# Altium PCB demo_board_shortened_DDR.PcbDoc (part 2 of 2)
Units mil, origin at the board's own origin, x right, y up, seen from the top; angles counter-clockwise.
Board outline 6000 x 4000 mil, 4 copper layers (L1, L2, L3, L4), stack 64.6 mil thick; 47 components, 45 nets, 406 pads, 119 vias.
Unrouted connection lines stored in the file: 95.
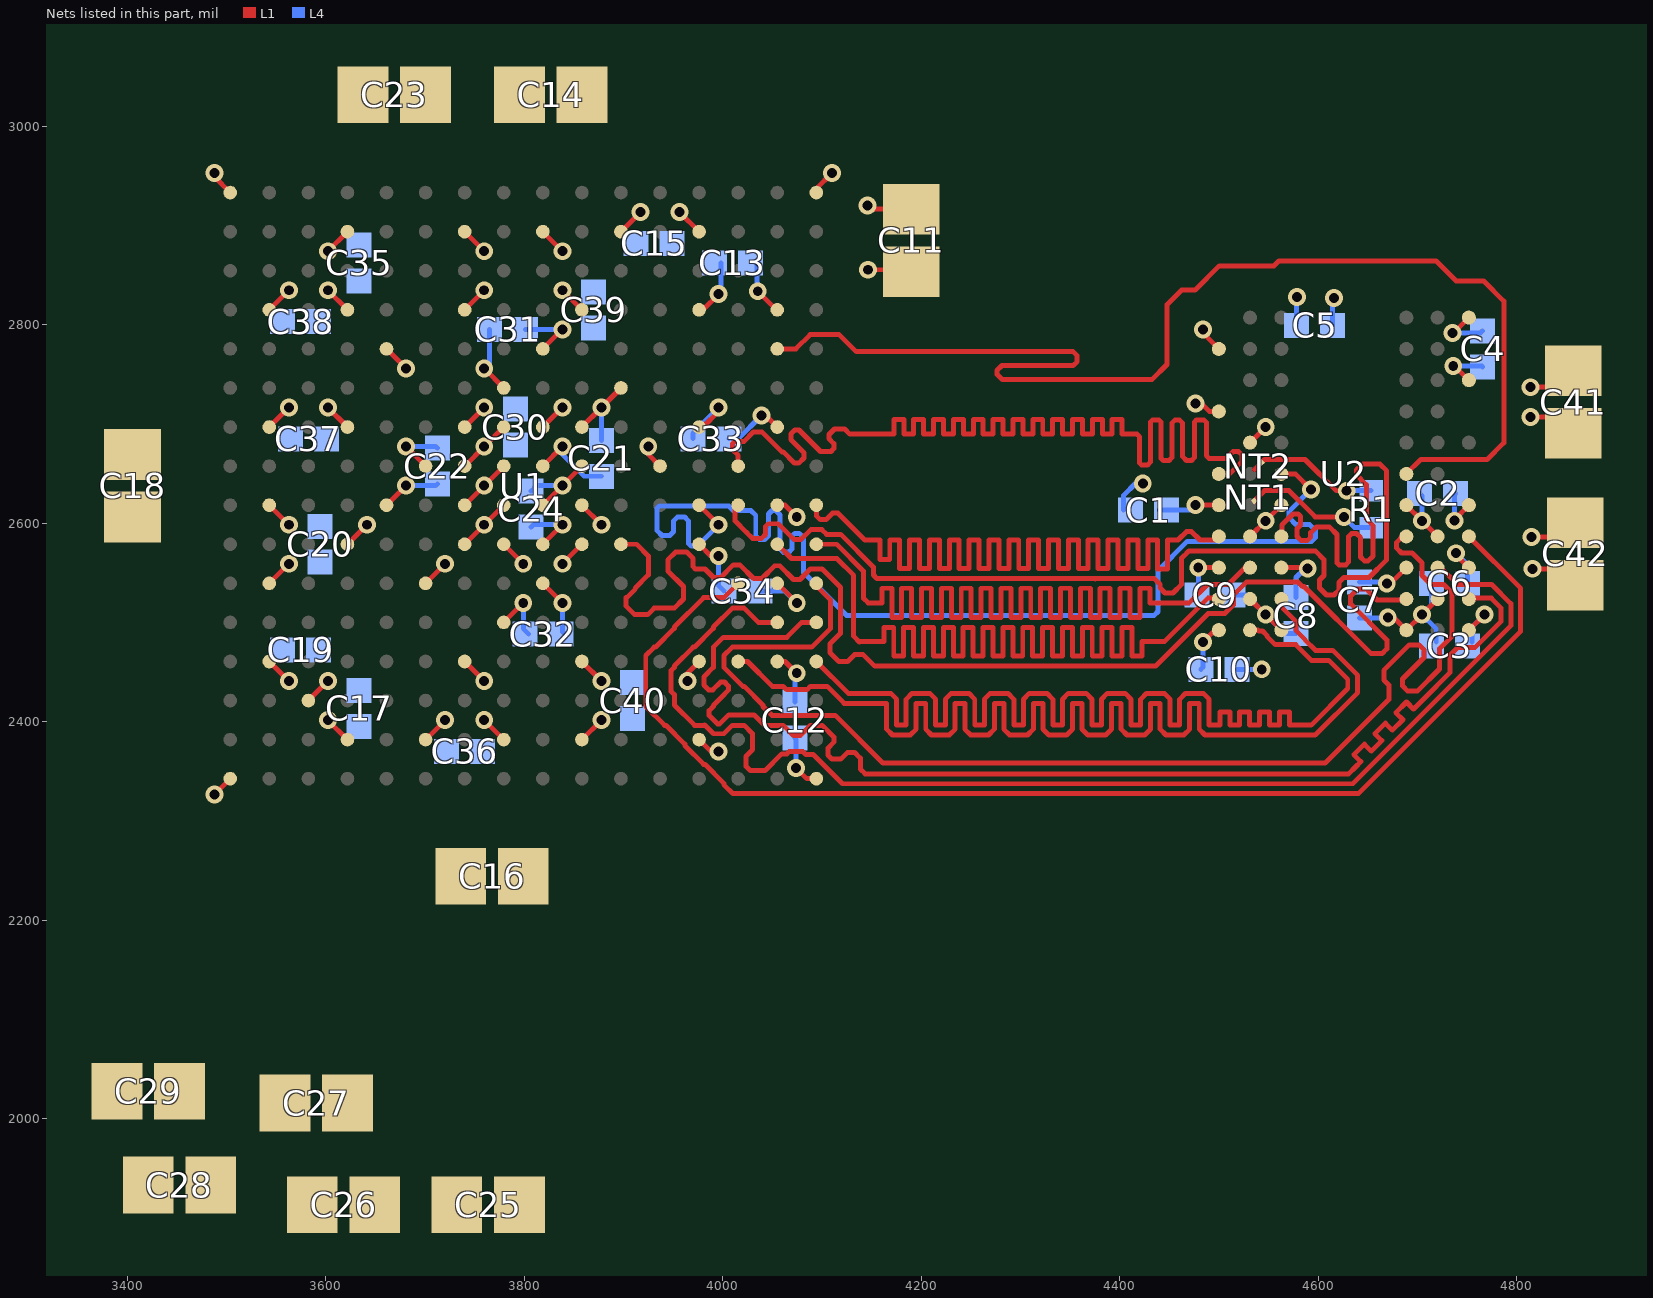
[diagram p3: the nets of this part, all layers, seen from the top]

## Via types
v1: diameter 18, hole 10, L1 to L4, 119 vias

## Nets (pads, with @x,y where several pads share a name; then routed paths per layer and width w, separated by ;. In a path a pad name is that pad's centre, name@x,y a point inside that pad or via, vN(x,y) a via of type N, cw(c..) or ccw(c..) an arc to the next point about the centre after c; other vN are vias at no path point) (continued)
DM/RDQS: U1.K11 U2.B3 | length 1280.2
  L1 w5: U1.K11@3897.64,2578.74 3913.39,2578.74 3925.2,2566.93 3925.2,2547.91 3912.03,2534.74 3912.03,2533.41 3903.6,2524.98 3902.93,2524.98 3902.93,2516.36 3911.42,2507.87 3924.53,2507.87 3931.05,2514.39 3951.4,2514.39 3960.63,2523.62 3960.63,2536.1 3944.88,2551.85 3944.88,2562.99 3952.76,2570.87 3963.9,2570.87 3970.42,2564.35 3970.42,2556.16 3972.82,2553.76 3982.34,2553.76 3990.82,2545.28 3998.03,2545.28 4010.83,2558.07 4017.4,2558.07 4031.18,2544.29 4039.69,2544.29 4052.48,2557.09 4057.75,2557.09 4071.53,2543.31 4078.07,2543.31 4088.53,2553.76 4100.45,2553.76 4118.88,2535.33 4118.88,2488.96 4108.27,2478.35 4108.27,2469.49 4117.13,2460.63 4125.98,2460.63 4132.87,2467.52 4141.73,2467.52 4153.35,2455.9 4436.22,2455.9 4489.35,2509.04 4506.04,2509.04 4514.59,2517.58 4514.59,2527.34 4527.78,2540.53 4579.83,2540.53 4584.24,2536.12 4585.89,2536.12 4653.5,2468.5 4664.37,2468.5 4669.29,2473.43 4669.29,2482.28 4632.87,2518.7 4632.87,2526.57 4639.76,2533.46 4648.62,2533.46 4659.45,2522.64 4687.99,2522.64 U2.B3@4688.98,2523.62
DQ0: U1.L14 U2.D1 | length 1279.9
  L1 w5: U1.L14@4015.75,2539.37 4001.36,2524.98 3981.01,2524.98 3951.4,2495.37 3951.4,2494.04 3932.38,2475.02 3931.05,2475.02 3922.62,2466.59 3922.62,2415.3 3941.64,2396.28 3942.97,2396.28 3961.99,2377.26 3961.99,2375.93 3981.01,2356.91 3982.34,2356.91 4001.36,2337.89 4001.36,2336.56 4010.48,2327.44 4640.59,2327.44 4804.22,2491.07 4804.22,2534.37 U2.D1@4751.97,2586.61
DQ1: U1.L16 U2.D3 | length 1281.1
  L1 w5: U1.L16@4094.49,2539.37 4097.59,2536.27 4096.3,2534.97 4108.88,2522.39 4108.88,2494.04 4089.86,2475.02 4009.79,2475.02 4001.36,2466.59 4001.36,2454.67 4020.38,2435.65 4021.71,2435.65 4040.73,2416.63 4040.73,2415.3 4049.75,2406.28 4113.41,2406.28 4161.42,2358.27 4607.24,2358.27 4671.26,2422.29 4671.26,2437.01 4666.34,2441.93 4666.34,2451.77 4691.93,2477.36 4701.77,2477.36 4706.69,2472.44 4706.69,2464.57 4685.04,2442.91 4685.04,2436.07 4690.31,2430.79 4700.11,2430.79 4722.44,2453.12 4722.44,2473.47 4735.06,2486.08 4735.06,2529.66 4726.51,2538.21 4713.76,2538.21 4704.72,2547.24 4704.72,2560 4694.84,2569.88 4684.06,2569.88 4679.13,2574.8 4679.13,2580.71 4685.04,2586.61 U2.D3@4688.98,2586.61
DQ2: U1.M15 U2.C2 | length 1281
  L1 w5: U1.M15@4055.12,2500 4036.1,2500 4021.71,2514.39 4009.79,2514.39 3990.77,2495.37 3990.77,2494.04 3971.75,2475.02 3970.42,2475.02 3951.4,2456 3951.4,2454.67 3948.06,2451.33 3948.06,2430.56 3951.4,2427.22 3951.4,2416.71 3971.83,2396.28 3981.59,2396.28 3981.96,2396.65 3990.82,2387.8 4001.3,2387.8 4009.79,2396.28 4021.71,2396.28 4030.14,2387.85 4030.14,2371.67 4023.62,2365.16 4023.62,2355 4027.89,2350.73 4042.97,2350.73 4059.75,2367.5 4064.72,2367.5 4067.18,2369.96 4080.85,2369.96 4083.9,2366.91 4091.39,2366.91 4120.86,2337.44 4635.05,2337.44 4794.22,2496.61 4794.22,2518.85 4774.86,2538.21 4740.66,2538.21 4723.75,2555.12 U2.C2@4720.47,2555.12
DQ3: U1.M16 U2.B1 | length 1279.1
  L1 w5: U1.M16@4094.49,2500 4079.72,2500 4064.74,2485.02 4000.77,2485.02 3990.77,2475.02 3990.77,2454.67 3981.3,2445.2 3981.3,2436.69 3985.9,2432.09 3990.16,2432.09 3998.03,2439.96 4001.93,2439.96 4005.91,2435.98 4005.91,2431.77 4001.36,2427.22 4001.36,2426.93 3990.77,2416.34 3990.77,2415.3 3986.55,2411.08 3986.55,2406.21 3994.97,2397.8 3997.16,2397.8 4006.24,2406.87 4031.74,2406.87 4042.33,2396.28 4061.08,2396.28 4071.53,2385.83 4078.07,2385.83 4088.53,2396.28 4100.45,2396.28 4112.2,2384.52 4112.2,2379.26 4106.3,2373.35 4106.3,2366.14 4110.24,2362.2 4119.09,2362.2 4125.98,2369.09 4132.95,2369.09 4138.78,2363.26 4138.78,2352.36 4143.7,2347.44 4630.91,2347.44 4637.8,2354.33 4643.1,2359.63 4636.03,2366.71 4646.63,2377.31 4653.71,2370.24 4664.31,2380.85 4657.24,2387.92 4667.85,2398.52 4674.92,2391.45 4685.52,2402.06 4678.45,2409.13 4689.06,2419.74 4696.13,2412.67 4706.69,2423.23 4732.78,2449.31 4732.78,2466.66 4741.01,2474.9 4758.37,2474.9 4784.22,2500.75 4784.22,2514.71 4774.55,2524.37 4752.72,2524.37 U2.B1@4751.97,2523.62
DQ4: U1.J14 U2.D7 | length 1279.8
  L1 w5: U1.J14@4015.75,2618.11 4012.56,2614.93 4012.56,2602.36 4024.45,2590.48 4024.45,2590.39 4030.19,2584.65 4039.37,2584.65 4043.31,2588.58 4043.31,2596.54 4046.18,2599.41 4056.1,2599.41 4071.85,2583.66 4079.06,2583.66 4088.9,2593.5 4100.07,2593.5 4104.84,2588.74 4119.04,2588.74 4152.05,2555.73 4152.05,2547.76 4155.51,2544.29 4155.64,2544.42 4374.65,2544.42 4375.51,2543.56 4376.37,2544.42 4434.65,2544.42 4440.94,2538.13 4440.94,2534.61 4445.87,2529.68 4453.9,2529.68 4462.6,2538.39 4462.6,2564.67 4464.61,2566.68 4469.95,2572.03 4597.26,2572.03 4606.07,2563.22 4606.07,2547.3 4601.54,2542.77 4601.54,2534.61 4608.59,2527.56 4616.14,2527.56 4621.06,2532.48 4621.06,2540.35 4625.98,2545.28 4651.42,2545.28 4669.13,2562.99 4669.13,2652.72 4662.4,2659.45 4644.69,2659.45 4638.78,2653.54 4638.78,2648.62 4648.62,2638.78 4648.62,2604.33 4655.51,2597.44 4655.51,2566.93 4650.59,2562.01 4646.65,2562.01 4642.72,2565.94 4642.72,2585.63 4638.78,2589.57 4633.86,2589.57 4630.91,2586.61 4630.91,2561.02 4627.95,2558.07 4621.06,2558.07 4619.09,2560.04 4619.09,2588.58 4611.38,2596.3 4598.43,2596.3 4592.52,2590.39 4592.52,2585.63 4589.57,2582.68 4582.68,2582.68 4578.74,2586.61 4578.74,2594.49 4582.33,2598.08 4582.33,2606.94 4579.99,2609.27 4574.78,2609.27 4563.74,2598.23 4563.74,2586.61 U2.D7@4562.99,2586.61
DQ5: U1.J16 U2.D9 | length 1280.5
  L1 w5: U1.J16@4094.49,2618.11 4094.49,2607.44 4098.43,2603.5 4104.22,2603.5 4110.95,2610.24 4116.18,2610.24 4143.44,2582.97 4148.44,2582.97 4158.44,2582.97 4158.44,2563.48 4168.44,2563.48 4168.44,2582.97 4178.44,2582.97 4178.44,2554.42 4188.44,2554.42 4188.44,2582.97 4198.44,2582.97 4198.44,2554.42 4208.44,2554.42 4208.44,2582.97 4218.44,2582.97 4218.44,2554.42 4228.44,2554.42 4228.44,2582.97 4238.44,2582.97 4238.44,2554.42 4248.44,2554.42 4248.44,2582.97 4258.44,2582.97 4258.44,2554.42 4268.44,2554.42 4268.44,2582.97 4278.44,2582.97 4278.44,2554.42 4288.44,2554.42 4288.44,2582.97 4298.44,2582.97 4298.44,2554.42 4308.44,2554.42 4308.44,2582.97 4318.44,2582.97 4318.44,2554.42 4328.44,2554.42 4328.44,2582.97 4338.44,2582.97 4338.44,2554.42 4348.44,2554.42 4348.44,2582.97 4358.44,2582.97 4358.44,2554.42 4368.44,2554.42 4368.44,2582.97 4378.44,2582.97 4378.44,2554.42 4388.44,2554.42 4388.44,2582.97 4398.44,2582.97 4398.44,2554.42 4408.44,2554.42 4408.44,2582.97 4418.44,2582.97 4418.44,2554.42 4428.44,2554.42 4428.44,2582.97 4438.44,2582.97 4438.44,2553.67 4448.44,2553.67 4448.44,2582.97 4454.72,2582.97 4458.92,2582.97 4467.56,2591.61 4472.37,2591.61 4481,2582.97 4496.36,2582.97 U2.D9@4500,2586.61
DQ6: U1.K15 U2.B9 | length 1283.5
  L1 w5: U1.K15@4055.12,2578.74 4069.51,2564.35 4115.15,2564.35 4132.05,2547.45 4132.05,2486.06 4137.8,2480.32 4138.01,2480.53 4157.48,2480.53 4162.48,2480.53 4162.48,2494.85 4172.48,2494.85 4172.48,2480.53 4172.48,2466.26 4182.48,2466.26 4182.48,2480.53 4182.48,2494.85 4192.48,2494.85 4192.48,2480.53 4192.48,2466.26 4202.48,2466.26 4202.48,2480.53 4202.48,2494.85 4212.48,2494.85 4212.48,2480.53 4212.48,2466.26 4222.48,2466.26 4222.48,2480.53 4222.48,2494.85 4232.48,2494.85 4232.48,2480.53 4232.48,2466.26 4242.48,2466.26 4242.48,2480.53 4242.48,2494.85 4252.48,2494.85 4252.48,2480.53 4252.48,2466.26 4262.48,2466.26 4262.48,2480.53 4262.48,2494.85 4272.48,2494.85 4272.48,2480.53 4272.48,2466.26 4282.48,2466.26 4282.48,2480.53 4282.48,2494.85 4292.48,2494.85 4292.48,2480.53 4292.48,2466.26 4302.48,2466.26 4302.48,2480.53 4302.48,2494.85 4312.48,2494.85 4312.48,2480.53 4312.48,2466.26 4322.48,2466.26 4322.48,2480.53 4322.48,2494.85 4332.48,2494.85 4332.48,2480.53 4332.48,2466.26 4342.48,2466.26 4342.48,2480.53 4342.48,2494.85 4352.48,2494.85 4352.48,2480.53 4352.48,2466.26 4362.48,2466.26 4362.48,2480.53 4362.48,2494.85 4372.48,2494.85 4372.48,2480.53 4372.48,2466.26 4382.48,2466.26 4382.48,2480.53 4382.48,2494.85 4392.48,2494.85 4392.48,2480.53 4392.48,2466.26 4402.48,2466.26 4402.48,2480.53 4402.48,2494.85 4412.48,2494.85 4412.48,2480.53 4412.48,2466.26 4422.48,2466.26 4422.48,2480.53 4425.2,2480.53 4445.09,2480.53 4488.94,2524.37 4499.25,2524.37 U2.B9@4500,2523.62
DQ7: U1.K16 U2.C8 | length 1283.5
  L1 w5: U1.K16@4094.49,2578.74 4114.9,2578.74 4142.05,2551.59 4142.05,2524.29 4146.65,2519.68 4155.51,2519.68 4160.51,2519.68 4160.51,2534.42 4170.51,2534.42 4170.51,2519.68 4170.51,2505.12 4180.51,2505.12 4180.51,2519.68 4180.51,2534.42 4190.51,2534.42 4190.51,2519.68 4190.51,2505.12 4200.51,2505.12 4200.51,2519.68 4200.51,2534.42 4210.51,2534.42 4210.51,2519.68 4210.51,2505.12 4220.51,2505.12 4220.51,2519.68 4220.51,2534.42 4230.51,2534.42 4230.51,2519.68 4230.51,2505.12 4240.51,2505.12 4240.51,2519.68 4240.51,2534.42 4250.51,2534.42 4250.51,2519.68 4250.51,2505.12 4260.51,2505.12 4260.51,2519.68 4260.51,2534.42 4270.51,2534.42 4270.51,2519.68 4270.51,2505.12 4280.51,2505.12 4280.51,2519.68 4280.51,2534.42 4290.51,2534.42 4290.51,2519.68 4290.51,2505.12 4300.51,2505.12 4300.51,2519.68 4300.51,2534.42 4310.51,2534.42 4310.51,2519.68 4310.51,2505.12 4320.51,2505.12 4320.51,2519.68 4320.51,2534.42 4330.51,2534.42 4330.51,2519.68 4330.51,2505.12 4340.51,2505.12 4340.51,2519.68 4340.51,2534.42 4350.51,2534.42 4350.51,2519.68 4350.51,2505.12 4360.51,2505.12 4360.51,2519.68 4360.51,2534.42 4370.51,2534.42 4370.51,2519.68 4370.51,2505.12 4380.51,2505.12 4380.51,2519.68 4380.51,2534.42 4390.51,2534.42 4390.51,2519.68 4390.51,2505.12 4400.51,2505.12 4400.51,2519.68 4400.51,2534.42 4410.51,2534.42 4410.51,2519.68 4410.51,2505.12 4420.51,2505.12 4420.51,2519.68 4420.51,2534.42 4430.51,2534.42 4430.51,2519.68 4433.07,2519.68 4470.11,2519.68 4488.63,2538.21 4509.48,2538.21 4526.39,2555.12 U2.C8@4531.5,2555.12
DQS_N: U1.N16 U2.A8 | length 1283.5
  L1 w5: U1.N16@4094.49,2460.63 4126.67,2428.44 4169.5,2428.44 4175.35,2422.59 4175.35,2396.52 4185.04,2396.52 4185.04,2422.59 4190.9,2428.44 4208.87,2428.44 4214.72,2422.59 4214.72,2396.52 4224.41,2396.52 4224.41,2422.59 4230.27,2428.44 4248.24,2428.44 4254.09,2422.59 4254.09,2396.52 4263.78,2396.52 4263.78,2422.59 4269.64,2428.44 4287.61,2428.44 4293.46,2422.59 4293.46,2396.52 4303.15,2396.52 4303.15,2422.59 4309.01,2428.44 4326.98,2428.44 4332.83,2422.59 4332.83,2396.52 4342.52,2396.52 4342.52,2422.59 4348.38,2428.44 4366.35,2428.44 4372.2,2422.59 4372.2,2396.52 4381.89,2396.52 4381.89,2422.59 4387.75,2428.44 4405.72,2428.44 4411.57,2422.59 4411.57,2396.52 4421.26,2396.52 4421.26,2422.59 4427.12,2428.44 4445.09,2428.44 4450.94,2422.59 4450.94,2396.52 4460.63,2396.52 4460.63,2422.59 4466.49,2428.44 4484.46,2428.44 4490.31,2422.59 4490.31,2396.52 4496.06,2396.52 4501.06,2396.52 4501.06,2409.81 4511.06,2409.81 4511.06,2396.52 4521.06,2396.52 4521.06,2409.81 4531.06,2409.81 4531.06,2396.52 4541.06,2396.52 4541.06,2409.81 4551.06,2409.81 4551.06,2396.52 4561.06,2396.52 4561.06,2409.81 4571.06,2409.81 4571.06,2396.52 4578.74,2396.52 4593.04,2396.52 4629.92,2433.39 4629.92,2442.55 4610.65,2461.82 4593.3,2461.82 4577.58,2477.54 4556.95,2477.54 4548.41,2486.08 4548.41,2487.03 4544.06,2491.37 4540.41,2491.37 4539.66,2492.13 U2.A8@4531.5,2492.13
DQS_P: U1.N14 U2.B7 | length 1283
  L1 w5: U1.N14@4015.75,2460.63 4025.14,2460.63 4050.12,2435.65 4061.08,2435.65 4064.41,2432.31 4085.19,2432.31 4088.53,2435.65 4105.33,2435.65 4122.53,2418.44 4165.35,2418.44 4165.35,2392.37 4171.21,2386.52 4189.18,2386.52 4195.04,2392.37 4195.04,2418.44 4204.72,2418.44 4204.72,2392.37 4210.58,2386.52 4228.55,2386.52 4234.41,2392.37 4234.41,2418.44 4244.09,2418.44 4244.09,2392.37 4249.95,2386.52 4267.92,2386.52 4273.78,2392.37 4273.78,2418.44 4283.46,2418.44 4283.46,2392.37 4289.32,2386.52 4307.29,2386.52 4313.15,2392.37 4313.15,2418.44 4322.83,2418.44 4322.83,2392.37 4328.69,2386.52 4346.66,2386.52 4352.52,2392.37 4352.52,2418.44 4362.2,2418.44 4362.2,2392.37 4368.06,2386.52 4386.03,2386.52 4391.89,2392.37 4391.89,2418.44 4401.57,2418.44 4401.57,2392.37 4407.43,2386.52 4425.4,2386.52 4431.26,2392.37 4431.26,2418.44 4440.94,2418.44 4440.94,2392.37 4446.8,2386.52 4464.77,2386.52 4470.63,2392.37 4470.63,2418.44 4480.31,2418.44 4480.31,2392.37 4486.17,2386.52 4597.18,2386.52 4639.92,2429.25 4639.92,2446.69 4614.8,2471.82 4597.44,2471.82 4586.61,2482.65 4586.61,2483.09 4577.58,2492.13 4577.58,2501.16 4562.99,2515.75 U2.B7@4562.99,2523.62
GND: C1.1 C2.1 C3.1 C4.1 C5.1 C6.1 C7.1 C8.1 C9.1 C10.1 C11.1 C12.1 C13.1 C14.1 C15.1 C16.1 C17.1 C18.1 C19.1 C20.1 C21.1 C22.1 C23.1 C24.1 C25.1 C26.1 C27.1 C28.1 C29.1 C30.1 C31.1 C32.1 C33.1 C34.1 C35.1 C36.1 C37.1 C38.1 C39.1 C40.1 C41.1 C42.1 U1.A1 U1.A16 U1.B7 U1.B11 U1.D4 U1.D13 U1.E9 U1.G2 U1.G8 U1.G15 U1.H7 U1.H9 U1.H12 U1.J5 U1.J8 U1.K7 U1.K9 U1.L2 U1.L15 U1.M8 U1.N13 U1.P3 U1.R6 U1.R10 U1.T1 U1.T16 U2.A3 U2.A7 U2.B2 U2.B8 U2.D2 U2.D8 U2.E3 U2.E7 U2.G8 U2.J1 U2.K9 | length 1791.6
  L1 w5: v1(3488.19,2326.77) U1.T1@3503.94,2342.52 ; v1(3488.19,2952.76) 3488.19,2948.82 U1.A1@3503.94,2933.07 ; U1.L2@3543.31,2539.37 v1(3562.99,2559.06) ; U1.G2@3543.31,2696.85 v1(3562.99,2716.54) ; U1.P3@3582.68,2421.26 v1(3602.36,2440.94) ; v1(3602.36,2834.65) U1.D4@3622.05,2814.96 ; U1.J5@3661.42,2618.11 v1(3681.1,2637.8) ; U1.R6@3700.79,2381.89 v1(3720.47,2401.57) ; U1.K7@3740.16,2578.74 v1(3759.84,2598.43) ; U1.H7@3740.16,2657.48 v1(3759.84,2677.17) U1.G8@3779.53,2696.85 ; U1.B7@3740.16,2893.7 v1(3759.84,2874.02) ; v1(3759.84,2598.43) U1.J8@3779.53,2618.11 ; U1.M8@3779.53,2500 v1(3799.21,2519.68) ; U1.K9@3818.9,2578.74 v1(3838.58,2598.43) ; U1.H9@3818.9,2657.48 v1(3838.58,2677.17) ; U1.E9@3818.9,2775.59 v1(3838.58,2795.28) ; U1.R10@3858.27,2381.89 v1(3877.95,2401.57) ; U1.B11@3897.64,2893.7 v1(3917.32,2913.39) ; v1(3925.2,2677.17) 3925.2,2669.29 U1.H12@3937.01,2657.48 ; v1(3964.56,2440.94) 3960.62,2444.88 U1.N13@3976.38,2460.63 ; U1.D13@3976.38,2814.96 3980.31,2814.96 v1(3996.06,2830.71) ; v1(4039.18,2708.47) 4039.18,2712.42 4039.36,2712.61 U1.G15@4055.12,2696.85 ; U1.L15@4055.12,2539.37 v1(4074.8,2519.68) ; v1(4074.02,2353.46) 4084.96,2342.52 U1.T16@4094.49,2342.52 ; U1.A16@4094.49,2933.07 4094.49,2937.01 v1(4110.24,2952.76) ; v1(4146,2920) 4146,2916.99 4146.65,2916.34 C11.1@4189.96,2916.34 ; v1(4484.25,2795.28) 4484.25,2791.34 U2.K9@4500,2775.59 ; U2.B8@4531.5,2523.62 v1(4547.24,2507.87) U2.A7@4562.99,2492.13 ; U2.D8@4531.5,2586.61 v1(4547.24,2602.36) U2.E7@4562.99,2618.11 ; U2.G8@4531.5,2681.1 v1(4547.24,2696.85) ; v1@4670.28,2502.95 4678.15,2502.95 U2.A3@4688.98,2492.13 v1(4704.72,2507.87) U2.B2@4720.47,2523.62 ; U2.E3@4688.98,2618.11 v1(4704.72,2602.36) U2.D2@4720.47,2586.61 ; v1(4736.22,2758.17) 4737.9,2758.17 U2.J1@4751.97,2744.09 ; v1(4814,2737) 4840.5,2737 C41.1@4857,2753.5 ; v1(4816,2554) 4842.5,2554 C42.1@4859,2537.5
  L4 w5: v1(3681.1,2637.8) 3711.02,2637.8 C22.1@3712.6,2639.37 ; v1(3799.21,2519.68) 3799.21,2493.7 C32.1@3804.72,2488.19 ; C31.1@3801.57,2795.28 v1(3838.58,2795.28) ; C24.1@3807.09,2596.06 3809.45,2598.43 v1(3838.58,2598.43) ; v1(3838.58,2677.17) 3838.58,2669.29 3860.63,2647.24 C21.1@3877.95,2647.24 ; v1(3996.06,2830.71) 3998.62,2833.27 C13.1@3998.62,2862.2 ; C33.1@4006.3,2685.04 4015.75,2685.04 v1(4039.18,2708.47) ; C34.1@4037.8,2531.5 4062.99,2531.5 v1(4074.8,2519.68) ; C12.1@4072.83,2383.46 4074.02,2382.28 v1(4074.02,2353.46) ; C1.1@4404.13,2613.19 4404.13,2627.95 4416.07,2639.89 v1(4423.44,2639.89) ; C9.1@4514.17,2527.56 4527.56,2527.56 v1(4547.24,2507.87) 4566.34,2488.78 C8.1@4577.76,2488.78 ; C10.1@4518.11,2452.76 v1(4543.31,2452.76) ; C5.1@4614.57,2799.21 4614.57,2825.2 v1(4616.14,2826.77) ; C7.1@4641.73,2504.53 4669.88,2504.53 v1(4670.28,2504.92) ; C2.1@4702.36,2629.92 4704.72,2627.56 v1(4704.72,2602.36) ; C6.1@4714.17,2539.37 4714.17,2517.32 v1(4704.72,2507.87) 4719.09,2493.5 C3.1@4719.09,2480.32 ; v1(4736.22,2758.17) 4765.06,2758.17 C4.1@4765.75,2757.48
MVDD: C1.2 C2.2 C3.2 C4.2 C5.2 C11.2 C12.2 C13.2 C33.2 C34.2 C41.2 U1.D15 U1.G13 U1.J15 U1.K13 U1.N15 U1.R13 U2.A1 U2.E1 U2.E9 U2.H9 U2.L1 | length 664.5
  L1 w5: U1.R13@3976.38,2381.89 3988.19,2370.08 v1(3996.06,2370.08) ; U1.K13@3976.38,2578.74 3988.19,2566.92 v1(3996.05,2566.92) ; U1.G13@3976.38,2696.85 3980.3,2696.85 3996.06,2712.61 v1(3996.06,2716.54) ; v1(4035.43,2833.66) 4054.13,2814.96 U1.D15@4055.12,2814.96 ; U1.N15@4055.12,2460.63 4062.98,2460.63 v1(4074.8,2448.81) ; U1.J15@4055.12,2618.11 4062.98,2618.11 v1(4074.8,2606.29) ; v1(4146.65,2855.32) 4187.99,2855.32 C11.2@4189.96,2853.35 ; v1(4476.38,2618.11) U2.E9@4500,2618.11 ; v1(4476.38,2720.47) 4482.65,2720.47 4490.52,2712.6 U2.H9@4500,2712.6 ; v1(4735.47,2791.47) 4736.36,2791.47 U2.L1@4751.97,2807.09 ; v1(4737.45,2602.49) 4737.45,2603.59 U2.E1@4751.97,2618.11 ; U2.A1@4751.97,2492.13 v1(4767.72,2507.87) ; v1(4814,2707) 4840.5,2707 C41.2@4857,2690.5
  L4 w5: C33.2@3970.08,2685.04 3970.08,2690.55 v1(3996.06,2716.54) ; v1(3996.05,2566.92) 3996.05,2537.02 C34.2@4001.57,2531.5 ; C13.2@4034.84,2862.2 4034.84,2834.25 v1(4035.43,2833.66) ; C12.2@4072.83,2419.69 4072.83,2446.85 v1(4074.8,2448.81) ; C1.2@4440.35,2613.19 4471.46,2613.19 v1(4476.38,2618.11) ; C5.2@4578.35,2799.21 4578.35,2827.36 v1(4578.74,2827.76) ; v1(4735.47,2791.47) 4763.52,2791.47 C4.2@4765.75,2793.7 ; v1(4737.45,2602.49) 4737.45,2628.79 C2.2@4738.58,2629.92 ; C3.2@4755.32,2480.32 4755.32,2495.47 v1(4767.72,2507.87)
MVDDQ: C6.2 C7.2 C8.2 C9.2 C10.2 C42.2 U2.A9 U2.C1 U2.C3 U2.C7 U2.C9 | length 326
  L1 w5: v1(4479.33,2555.12) U2.C9@4500,2555.12 ; v1(4484.25,2480.32) 4496.06,2492.13 U2.A9@4500,2492.13 ; U2.C7@4562.99,2555.12 4588.58,2555.12 v1(4589.57,2554.13) ; v1(4669.29,2539.37) 4673.23,2539.37 U2.C3@4688.98,2555.12 U2.C3@4692.22,2558.36 ; v1(4739.03,2569.74) 4739.03,2568.06 U2.C1@4751.97,2555.12 ; v1(4815,2586) 4844.5,2586 C42.2@4859,2600.5
  L4 w5: C9.2@4477.95,2527.56 4476.38,2529.13 4479.33,2532.09 v1(4479.33,2555.12) ; C10.2@4481.89,2452.76 4484.25,2455.12 v1(4484.25,2480.32) ; C8.2@4577.76,2525 4577.76,2545.28 4586.61,2554.13 v1(4589.57,2554.13) ; C7.2@4641.73,2540.75 4667.91,2540.75 v1(4669.29,2539.37) ; v1(4739.03,2569.74) 4750.39,2558.37 C6.2@4750.39,2539.37
NetNT1_1: NT1.1 R1.1 | length 127.9
  L1 w5: 4542.55,2629.16 4546.08,2632.7 4570.71,2632.7 4597.11,2606.3 v1(4625.98,2606.3)
  L4 w5: v1(4625.98,2606.3) 4636.81,2595.47 R1.1@4653.54,2595.47
NetNT2_1: NT2.1 R1.2 | length 125.1
  L1 w5: NT2.1@4542.91,2661.02 4546.08,2664.19 4586.79,2664.19 4618.34,2632.64 v1(4628.86,2632.64)
  L4 w5: v1(4628.86,2632.64) 4629.09,2632.87 R1.2@4653.54,2632.87
ODT: U1.H14 U2.F9 | length 1283.5
  L1 w5: U1.H14@4015.75,2657.48 4015.75,2668.26 4009.84,2674.17 4009.84,2680.12 4012.18,2682.46 4021.71,2682.46 4031.22,2691.97 4039.64,2691.97 4046.01,2685.6 4059.75,2671.87 4061.08,2671.87 4072.52,2660.43 4076.77,2660.43 4082.01,2665.67 4082.01,2670.94 4068.9,2684.06 4068.9,2689.96 4072.83,2693.9 4077.09,2693.9 4098.74,2672.24 4109.25,2672.24 4112.2,2675.2 4112.2,2680.12 4107.28,2685.04 4107.28,2689.3 4112.87,2694.88 4123.03,2694.88 4128.25,2689.67 4165.35,2689.67 4172.62,2689.67 4172.62,2704.21 4182.62,2704.21 4182.62,2689.67 4192.62,2689.67 4192.62,2704.21 4202.62,2704.21 4202.62,2689.67 4212.62,2689.67 4212.62,2704.21 4222.62,2704.21 4222.62,2689.67 4232.62,2689.67 4232.62,2704.21 4242.62,2704.21 4242.62,2689.67 4252.62,2689.67 4252.62,2704.21 4262.62,2704.21 4262.62,2689.67 4272.62,2689.67 4272.62,2704.21 4282.62,2704.21 4282.62,2689.67 4292.62,2689.67 4292.62,2704.21 4302.62,2704.21 4302.62,2689.67 4312.62,2689.67 4312.62,2704.21 4322.62,2704.21 4322.62,2689.67 4332.62,2689.67 4332.62,2704.21 4342.62,2704.21 4342.62,2689.67 4352.62,2689.67 4352.62,2704.21 4362.62,2704.21 4362.62,2689.67 4372.62,2689.67 4372.62,2704.21 4382.62,2704.21 4382.62,2689.67 4392.62,2689.67 4392.62,2704.21 4402.62,2704.21 4402.62,2689.67 4412.62,2689.67 4417.62,2689.67 4420.28,2687.01 4420.28,2660.43 4422.24,2658.46 4428.15,2658.46 4431.1,2661.42 4431.1,2701.77 4433.07,2703.74 4439.96,2703.74 4441.93,2701.77 4441.93,2665.35 4444.19,2663.09 4449.8,2663.09 4452.76,2666.04 4452.76,2700.79 4455.71,2703.74 4460.63,2703.74 4463.58,2700.79 4463.58,2667.03 4467.52,2663.09 4472.44,2663.09 4475.39,2666.04 4475.39,2701.77 4477.59,2703.97 4485,2703.97 4487.43,2701.55 4487.43,2668.08 4490.16,2665.35 4507.58,2665.35 4514.49,2672.26 4519.71,2672.26 4523.15,2668.82 4523.15,2661.89 4510.87,2649.61 U2.F9@4500,2649.61
RAS#: U1.J13 U2.F7 | length 1155.9
  L1 w5: U1.J13@3976.38,2618.11 v1(3996.06,2598.43) ; U2.F7@4562.99,2649.61 4577.13,2649.61 v1(4592.75,2633.99)
  L4 w5: v1(3996.06,2598.43) 3974.41,2576.77 3968.5,2576.77 3965.55,2579.72 3965.55,2602.36 3961.61,2606.3 3954.72,2606.3 3950.79,2602.36 3950.79,2591.54 3946.85,2587.6 3938.98,2587.6 3934.06,2592.52 3934.06,2615.16 3936.26,2617.36 4006.29,2617.36 4010.86,2612.79 4028.54,2612.79 4033.46,2607.87 4033.46,2587.36 4037.4,2583.42 4042.26,2583.42 4046.26,2587.42 4046.26,2609.25 4049.8,2612.79 4053.54,2612.79 4058.07,2608.27 4058.07,2573.89 4061.55,2570.41 4062.01,2570.87 4066.93,2570.87 4069.88,2573.82 4069.88,2586.84 4072.83,2589.79 4077.23,2589.79 4081.69,2585.33 4081.69,2550.27 4124.92,2507.05 4434.83,2507.05 4438.82,2511.03 4438.82,2552.08 4468.35,2581.62 4593.43,2581.62 4597.44,2585.63 4597.44,2592.52 4591.54,2598.43 4577.76,2598.43 4570.87,2605.32 4570.87,2612.1 v1(4592.75,2633.99)
VAUX: C21.2 C22.2 C23.2 C31.2 C32.2 U1.E5 U1.F8 U1.F11 U1.G10 U1.H6 U1.J10 U1.L6 U1.L9 | length 362.1
  L1 w5: U1.E5@3661.42,2775.59 v1(3681.1,2755.91) ; v1(3681.1,2677.17) U1.H6@3700.79,2657.48 ; U1.L6@3700.79,2539.37 v1(3720.47,2559.06) ; v1(3759.84,2755.91) U1.F8@3779.53,2736.22 ; U1.L9@3818.9,2539.37 v1(3838.58,2519.68) ; U1.J10@3858.27,2618.11 v1(3877.95,2598.43) ; U1.G10@3858.27,2696.85 v1(3877.95,2716.53) U1.F11@3897.64,2736.22
  L4 w5: v1(3681.1,2677.17) 3711.02,2677.17 C22.2@3712.6,2675.59 ; v1(3759.84,2755.91) 3765.35,2761.42 C31.2@3765.35,2795.28 ; v1(3838.58,2519.68) 3838.58,2490.55 C32.2@3840.94,2488.19 ; C21.2@3877.95,2683.46 v1(3877.95,2716.53)
VDD0: C14.2 C15.2 C35.2 C39.2 U1.B4 U1.B9 U1.B13 U1.D7 U1.D10 | length 139.2
  L1 w5: v1(3602.36,2874.02) U1.B4@3622.05,2893.7 ; U1.D7@3740.16,2814.96 v1(3759.84,2834.65) ; U1.B9@3818.9,2893.7 v1(3838.58,2874.02) ; v1(3838.58,2834.65) U1.D10@3858.27,2814.96 ; v1(3956.69,2913.39) U1.B13@3976.38,2893.7
VDD2: C16.2 C17.2 C36.2 C40.2 U1.N7 U1.N10 U1.R4 U1.R8 | length 111.4
  L1 w5: v1(3602.36,2401.57) U1.R4@3622.05,2381.89 ; U1.N7@3740.16,2460.63 v1(3759.84,2440.94) ; v1(3759.84,2401.57) U1.R8@3779.53,2381.89 ; U1.N10@3858.27,2460.63 v1(3877.95,2440.94)
VDD3: C18.2 C19.2 C20.2 C37.2 C38.2 U1.D2 U1.G4 U1.J2 U1.K4 U1.N2 | length 139.2
  L1 w5: U1.N2@3543.31,2460.63 v1(3562.99,2440.94) ; U1.J2@3543.31,2618.11 v1(3562.99,2598.43) ; U1.D2@3543.31,2814.96 v1(3562.99,2834.65) ; v1(3602.36,2716.54) U1.G4@3622.05,2696.85 ; U1.K4@3622.05,2578.74 v1(3641.73,2598.43)
VINT: C24.2 C25.2 C26.2 C27.2 C28.2 C29.2 C30.2 U1.G7 U1.G9 U1.H8 U1.H10 U1.J7 U1.J9 U1.K8 U1.K10 | length 256.5
  L1 w5: U1.J7@3740.16,2618.11 v1(3759.84,2637.8) U1.H8@3779.53,2657.48 ; U1.G7@3740.16,2696.85 v1(3759.84,2716.54) ; U1.K8@3779.53,2578.74 v1(3799.21,2559.06) ; U1.J9@3818.9,2618.11 v1(3838.58,2637.8) U1.H10@3858.27,2657.48 ; U1.G9@3818.9,2696.85 v1(3838.58,2716.54) ; v1(3838.58,2559.06) U1.K10@3858.27,2578.74
  L4 w5: C24.2@3807.09,2632.28 3812.6,2637.8 v1(3838.58,2637.8)
WE#: U1.E15 U2.F3 | length 1279.7
  L1 w5: U1.E15@4055.12,2775.59 4073.82,2775.59 4088.21,2789.98 4117.58,2789.98 4134.82,2772.74 4353.24,2772.74 4357.28,2768.7 4357.28,2762.8 4353.35,2758.86 4281.5,2758.86 4276.57,2753.94 4276.57,2750 4282.01,2744.57 4432.48,2744.57 4447.75,2759.84 4447.75,2820.16 4462.55,2834.96 4476.26,2834.96 4500.63,2859.33 4555.69,2859.33 4560.61,2864.26 4718.84,2864.26 4739.18,2843.92 4766.94,2843.92 4787.24,2823.61 4787.24,2680.94 4770.49,2664.19 4703.56,2664.19 U2.F3@4688.98,2649.61
pads on no net: U1.A2 U1.A3 U1.A4 U1.A5 U1.A6 U1.A7 U1.A8 U1.A9 U1.A10 U1.A11 U1.A12 U1.A13 U1.A14 U1.A15 U1.B1 U1.B2 U1.B3 U1.B5 U1.B6 U1.B8 U1.B10 U1.B12 U1.B14 U1.B16 U1.C1 U1.C2 U1.C3 U1.C4 U1.C5 U1.C6 U1.C7 U1.C8 U1.C9 U1.C10 U1.C11 U1.C12 U1.C13 U1.C14 U1.D1 U1.D3 U1.D5 U1.D6 U1.D8 U1.D9 U1.D11 U1.D12 U1.E1 U1.E2 U1.E3 U1.E4 U1.E6 U1.E7 U1.E8 U1.E10 U1.E11 U1.E12 U1.E13 U1.E14 U1.F1 U1.F2 U1.F3 U1.F4 U1.F5 U1.F6 U1.F7 U1.F9 U1.F10 U1.F12 U1.G1 U1.G3 U1.G5 U1.G6 U1.H1 U1.H2 U1.H3 U1.H4 U1.H5 U1.J1 U1.J3 U1.J4 U1.J6 U1.K1 U1.K2 U1.K3 U1.K5 U1.K6 U1.K12 U1.L1 U1.L3 U1.L4 U1.L5 U1.L7 U1.L8 U1.L10 U1.L11 U1.L12 U1.L13 U1.M1 U1.M2 U1.M3 U1.M4 U1.M5 U1.M6 U1.M7 U1.M9 U1.M10 U1.M11 U1.M12 U1.M13 U1.M14 U1.N1 U1.N3 U1.N4 U1.N5 U1.N6 U1.N8 U1.N9 U1.N11 U1.N12 U1.P1 U1.P2 U1.P4 U1.P5 U1.P6 U1.P7 U1.P8 U1.P9 U1.P10 U1.P11 U1.P12 U1.P13 U1.P14 U1.P15 U1.P16 U1.R1 U1.R2 U1.R3 U1.R5 U1.R7 U1.R9 U1.R11 U1.R12 U1.R14 U1.R15 U1.R16 U1.T2 U1.T3 U1.T4 U1.T5 U1.T6 U1.T7 U1.T8 U1.T9 U1.T10 U1.T11 U1.T12 U1.T13 U1.T14 U1.T15 U2.A2 U2.E2 U2.L3 U2.L7

## Polygon pours and split planes (outlines as drawn)
VDD0 on L3 "Bottom Layer-No Net" (solid, remove dead copper, pour order 21): 3503.94,2933.07 3641.73,2795.28 3937.01,2795.28 4074.8,2933.07
VDD3 on L3 "Bottom Layer-No Net" (solid, remove dead copper, pour order 17): 3503.94,2342.52 3503.94,2933.07 3641.73,2795.28 3641.73,2480.32 3503.94,2342.52
VDD2 on L3 "Bottom Layer-No Net" (solid, remove dead copper, pour order 13): 3503.94,2342.52 3641.73,2480.32 3937.01,2480.32 4074.8,2342.52
VINT on L3 "Bottom Layer-No Net" (solid, remove dead copper, pour order 8): 3740.16,2736.22 3740.16,2539.37 3858.27,2539.37 3858.27,2736.22 3740.16,2736.22
VAUX on L3 "Bottom Layer-No Net" (solid, remove dead copper, pour order 9): 3641.73,2795.28 3641.73,2480.32 3937.01,2480.31 3937.01,2795.28
MVDD on L3 "Bottom Layer-No Net" (solid, remove dead copper, shelved, pour order 7): 3910.93,2403.05 4006.89,2307.09 5064.96,2307.09 5064.96,2968.5 4069.88,2968.5 3937.01,2835.63 3937.01,2501.36 3910.93,2473.43
GND on L2 "Bottom Layer-No Net" (solid, remove dead copper, shelved, pour order 11): 3346.46,3188.98 3346.46,2204.72 5078.74,2204.72 5078.74,3188.98 3346.46,3188.98

## Keep-outs
L1:
  lines w10: 4125.98,2618.11 4148.62,2595.47 4453.74,2595.47 ; 4133.86,2405.51 4165.35,2374.02 4602.36,2374.02 4653.54,2425.2 4653.54,2450.79 4580.71,2523.62 ; 4133.86,2677.17 4405.51,2677.17 ; 4149.61,2440.94 4515.75,2440.94 4531.5,2425.2 4582.68,2425.2 ; 4439.96,2650.59 4482.28,2650.59